# Altium PCB Source_Selector without cap.PcbDoc
Units mm, origin at the board's own origin, x right, y up, seen from the top; angles counter-clockwise.
Board outline 86.21 x 38.86 mm, 4 copper layers (Top Layer, GND, Power, Bottom Layer), stack 1.954 mm thick; 62 components, 42 nets, 204 pads, 22 vias.
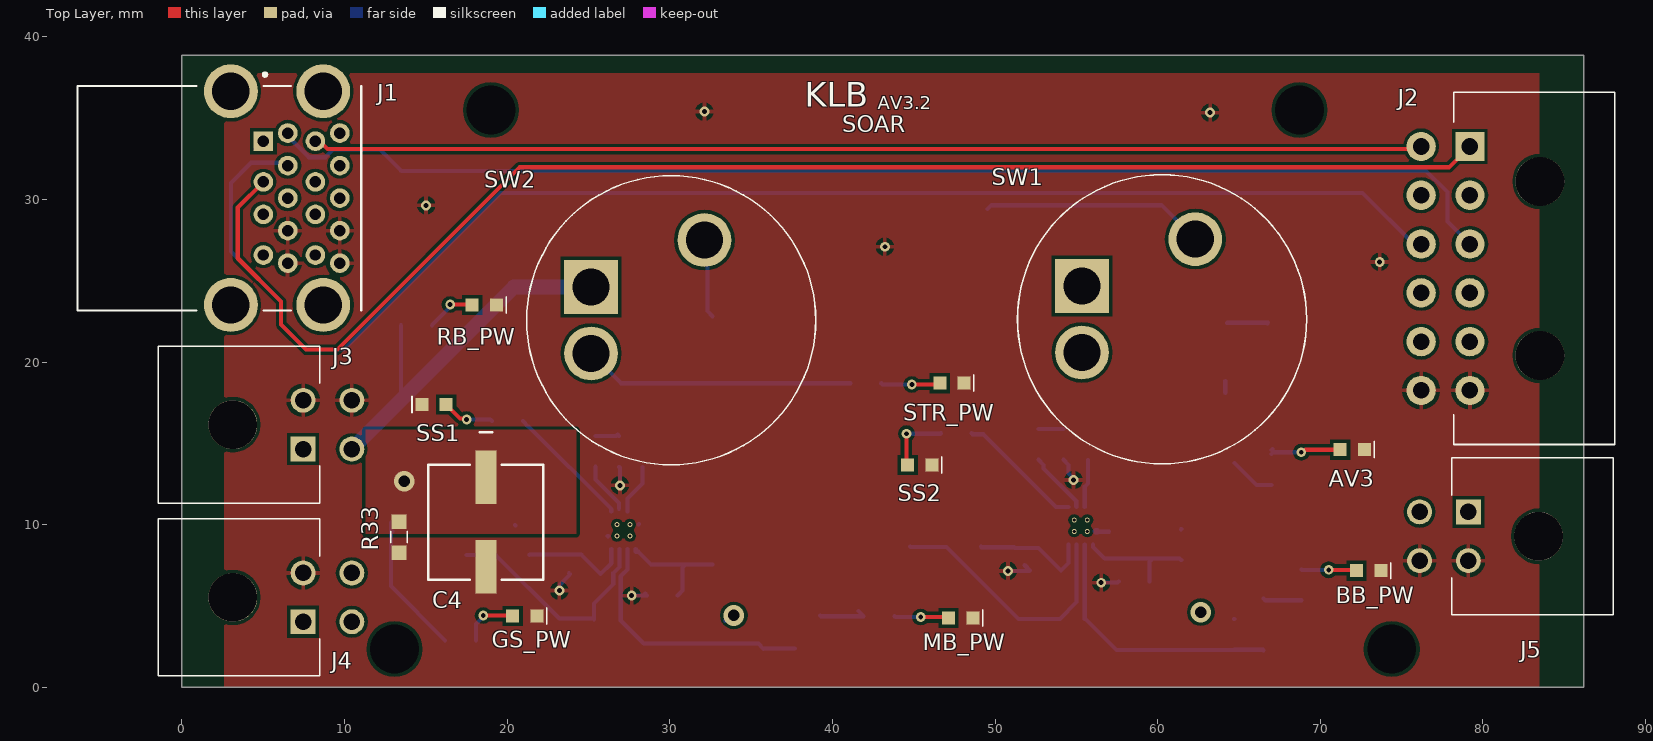
[diagram p0: Top Layer view]
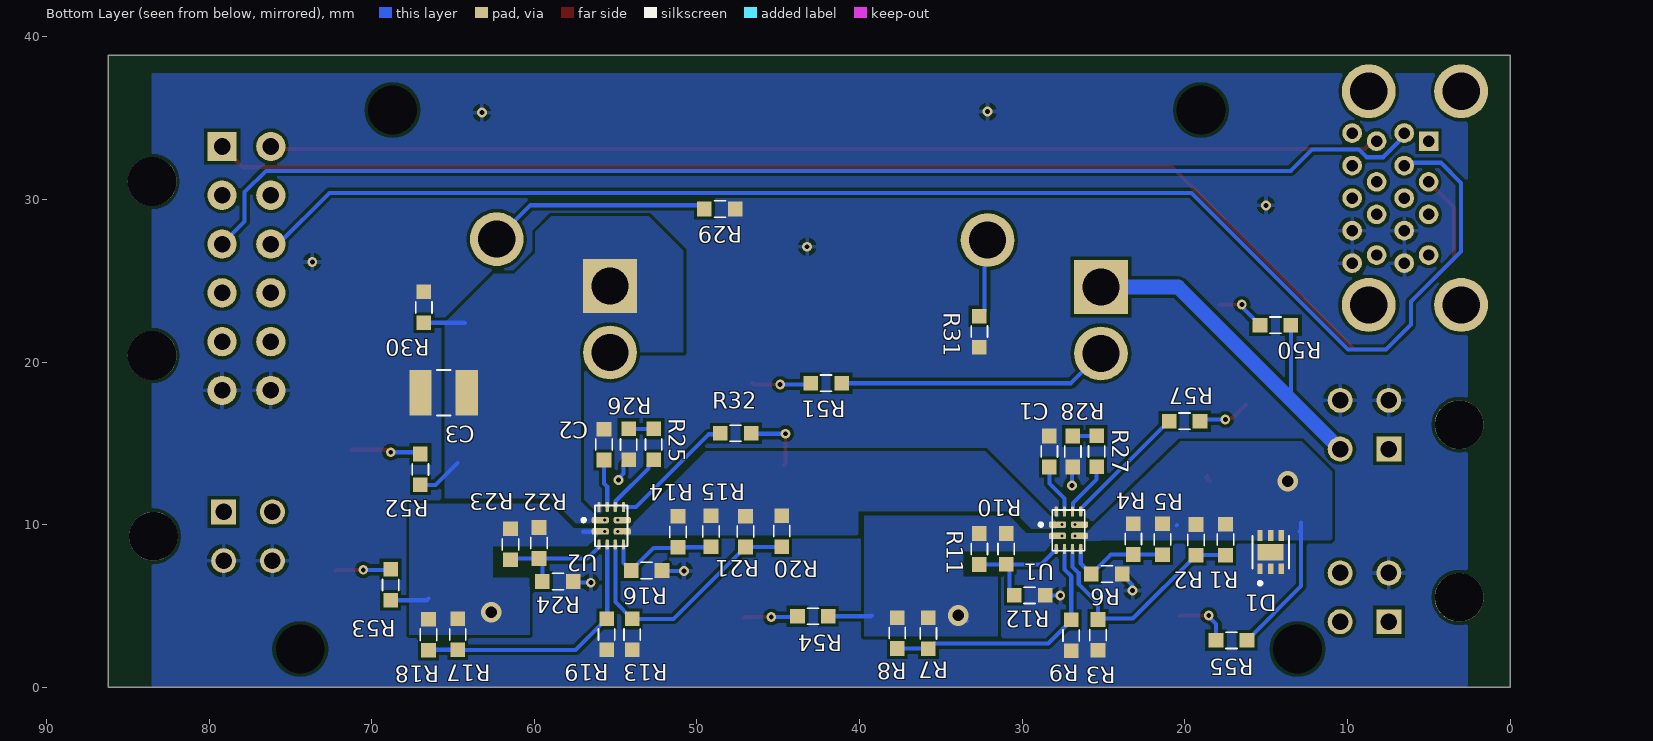
[diagram p1: Bottom Layer view, seen from below]
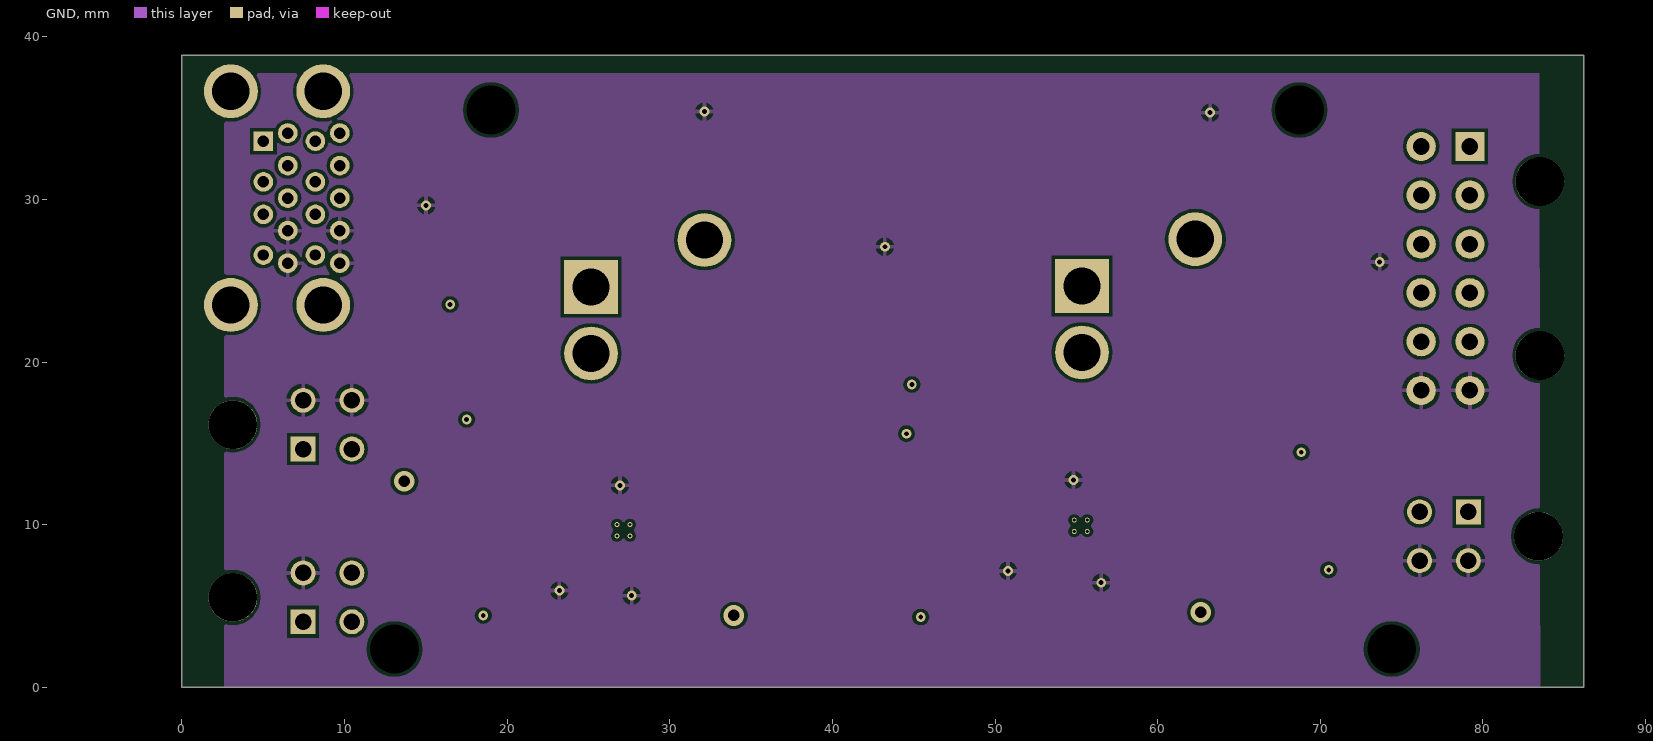
[diagram p2: GND]
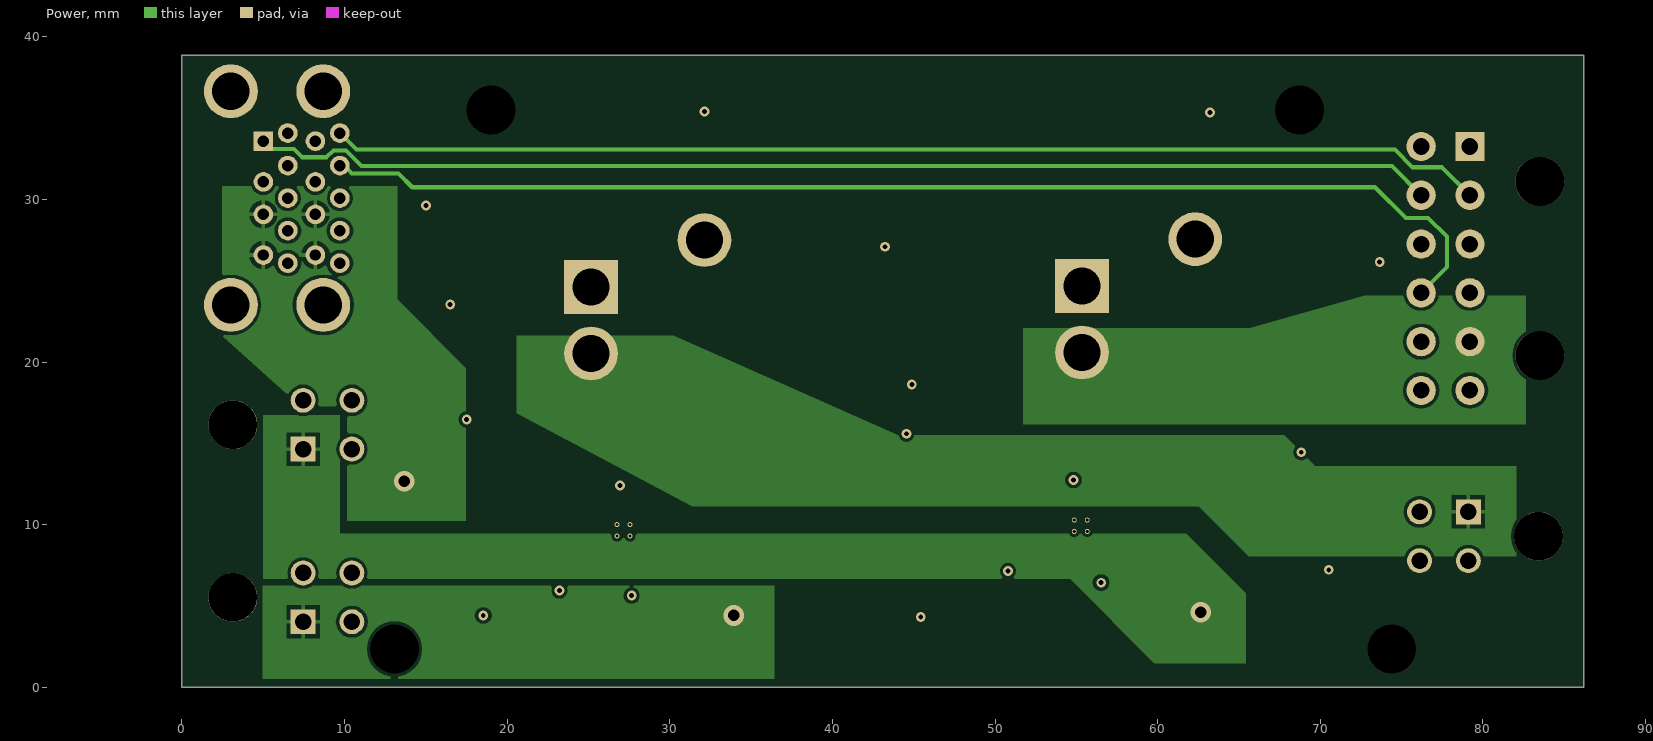
[diagram p3: Power]
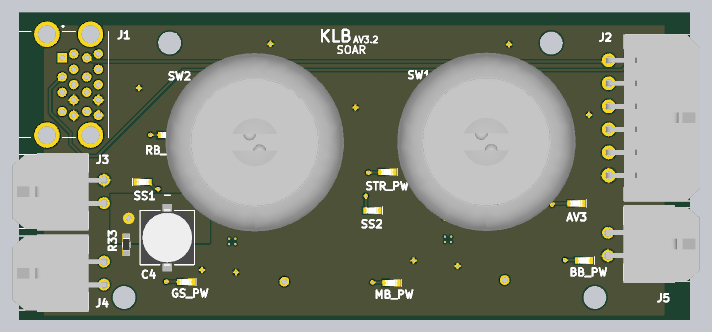
[diagram p4: 3D render of the assembled board from above, using the file's embedded part models]
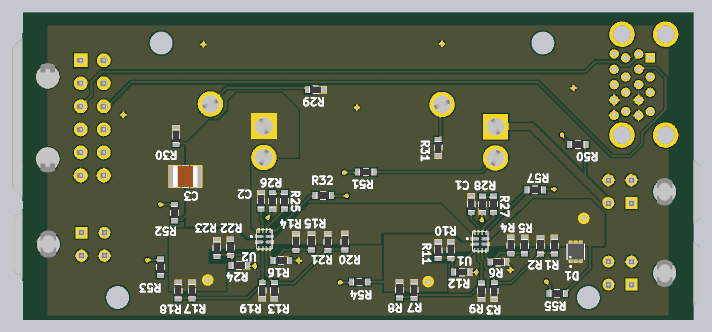
[diagram p5: 3D render of the assembled board from below, using the file's embedded part models]

## Layer stack, top to bottom
Top Solder: solder mask 0.01, Solder Resist, Dk 3.5
Top Layer: signal copper 0.071
Dielectric 2: prepreg 0.071, PP-006, Dk 4.1
GND: signal copper 0.035
Dielectric 1: dielectric 1.6, FR-4, Dk 4.8
Power: signal copper 0.035
Dielectric 3: prepreg 0.071, PP-006, Dk 4.1
Bottom Layer: signal copper 0.071
Bottom Solder: solder mask 0.01, Solder Resist, Dk 3.5

## Board outline
0,0 0,38.862 86.208,38.862 86.208,0

## Design rules (kind name [scope] priority, off if disabled: settings)
Clearance [All] p1: gap=0.204 ignorepadtopadclearanceinfootprint=TRUE
DiffPairsRouting [All] p1: maxlimit=0.254 minlimit=0.254 mostfreqgap=0.254 toplayer_minwidth=0.381 toplayer_maxwidth=0.381 toplayer_prefwidth=0.381 midlayer1_minwidth=0.381 midlayer1_maxwidth=0.381 midlayer1_prefwidth=0.381 midlayer2_minwidth=0.381 midlayer2_maxwidth=0.381 midlayer2_prefwidth=0.381 bottomlayer_minwidth=0.381 bottomlayer_maxwidth=0.381 bottomlayer_prefwidth=0.381 substack1={DE8956C6-F9BE-4731-8523-C3B132525F0B} toplayer_{de8956c6-f9be-4731-8523-c3b132525f0b}_minwidth=0.381 toplayer_{de8956c6-f9be-4731-8523-c3b132525f0b}_maxwidth=0.381 toplayer_{de8956c6-f9be-4731-8523-c3b132525f0b}_prefwidth=0.381 midlayer1_{de8956c6-f9be-4731-8523-c3b132525f0b}_minwidth=0.381 midlayer1_{de8956c6-f9be-4731-8523-c3b132525f0b}_maxwidth=0.381 midlayer1_{de8956c6-f9be-4731-8523-c3b132525f0b}_prefwidth=0.381 midlayer2_{de8956c6-f9be-4731-8523-c3b132525f0b}_minwidth=0.381 midlayer2_{de8956c6-f9be-4731-8523-c3b132525f0b}_maxwidth=0.381 midlayer2_{de8956c6-f9be-4731-8523-c3b132525f0b}_prefwidth=0.381 bottomlayer_{de8956c6-f9be-4731-8523-c3b132525f0b}_minwidth=0.381 bottomlayer_{de8956c6-f9be-4731-8523-c3b132525f0b}_maxwidth=0.381 bottomlayer_{de8956c6-f9be-4731-8523-c3b132525f0b}_prefwidth=0.381 maxuncoupledlength=12.7
Height [All] p1: minheight=0 maxheight=40 prefheight=4
PolygonConnect [All] p1: thpad.connectstyle=Relief thpad.reliefconductorwidth=0.254 thpad.reliefentries=4 thpad.polygonreliefangle="90 Angle" thpad.airgapwidth=0.254 smdpad.connectstyle=Direct smdpad.reliefconductorwidth=0.254 smdpad.reliefentries=4 smdpad.polygonreliefangle="90 Angle" smdpad.airgapwidth=0.254 via.connectstyle=Relief via.reliefconductorwidth=0.254 via.reliefentries=4 via.polygonreliefangle="90 Angle" via.airgapwidth=0.254
RoutingVias [All] p1: holewidth=0.711 width=1.27 viastyle="Through Hole" minholewidth=0.711 minwidth=1.27 maxholewidth=0.711 maxwidth=1.27
SolderMaskExpansion [All] p1: expansion=0.102 istentingtop=FALSE
Width [All] p1: maxlimit=1 minlimit=0.204 preferedwidth=0.254 substack1={DE8956C6-F9BE-4731-8523-C3B132525F0B} toplayer_{de8956c6-f9be-4731-8523-c3b132525f0b}_minwidth=0.15 toplayer_{de8956c6-f9be-4731-8523-c3b132525f0b}_maxwidth=0.254 midlayer1_{de8956c6-f9be-4731-8523-c3b132525f0b}_minwidth=0.15 midlayer1_{de8956c6-f9be-4731-8523-c3b132525f0b}_maxwidth=0.254 midlayer2_{de8956c6-f9be-4731-8523-c3b132525f0b}_minwidth=0.15 midlayer2_{de8956c6-f9be-4731-8523-c3b132525f0b}_maxwidth=0.254 bottomlayer_{de8956c6-f9be-4731-8523-c3b132525f0b}_minwidth=0.15 bottomlayer_{de8956c6-f9be-4731-8523-c3b132525f0b}_maxwidth=0.254
28 further rules are at their usual default settings.

## Classes and differential pairs
component class Source_Selector: AV3 BB_PW C1 C2 C3 GS_PW J1 J2 J3 J4 J5 MB_PW R1 R2 R3 R4 R5 R6 R7 R8 R9 R10 R11 R12 R13 R14 R15 R16 R17 R18 R19 R20 R21 R22 R23 R24 R25 R26 R27 R28 R29 R30 R31 R50 R51 R52 R53 R54 R55 R57 RB_PW SS1 STR_PW SW1 SW2 U1 U2

## Components (designator, comment, footprint, x,y, rotation, side; value= is the part's Value field where it differs from the comment)
AV3 "LTST-C191KGKT" LTST-C191KGKT 71.972,14.612 r180 top
BB_PW "LTST-C191KGKT" LTST-C191KGKT 72.979,7.17 r180 top
C1 "04025A101JAT2A" 0603[1608] 28.331,14.501 r270 bottom
C2 "04025A101JAT2A" 0603[1608] 55.715,14.928 r270 bottom
C3 "EMK325ABJ107MM-P" CAPC3225X280N 65.573,18.11 r180 bottom
C4 "UZG1E330MCL1GB" PCAP_6.3x3-ELECT_NCA-M 18.689,10.16 r270 top
D1 "TVS1800DRVR" TVS1800DRVR 14.722,8.311 r90 bottom
GS_PW "LTST-C191KGKT" LTST-C191KGKT 21.092,4.381 r180 top
J1 "0484060003" MOLEX_0484060003 6.359,30.082 r270 top
J2 "10132449-1221GLF" 10132449-1221GLF 79.849,25.757 r90 top
J3 "0430450400" 0430450400 6.792,16.15 r270 top
J4 "0430450400" 0430450400 6.792,5.533 r270 top
J5 "0430450400" 0430450400 79.763,9.289 r90 top
MB_PW "LTST-C191KGKT" LTST-C191KGKT 47.882,4.265 r180 top
R1 "MCT06030D5112BP500" 0603[1608] 17.503,9.083 r90 bottom
R2 "MCT06030D5112BP500" 0603[1608] 19.312,9.065 r90 bottom
R3 "RQ73C1J2K1BTD" 0603[1608] 25.336,3.223 r90 bottom
R4 "RNCF0603BTC20K0" 0603[1608] 23.167,9.116 r90 bottom
R5 "RMCF0603FT665K" 0603[1608] 21.374,9.098 r90 bottom
R6 "RT0603BRD075K11L" 0603[1608] 24.795,6.972 r0 bottom
R7 "MCT06030D5112BP500" 0603[1608] 35.768,3.32 r90 bottom
R8 "MCT06030D5112BP500" 0603[1608] 37.681,3.335 r90 bottom
R9 "RQ73C1J2K1BTD" 0603[1608] 26.993,3.198 r90 bottom
R10 "RT0603BRD0724KL" 0603[1608] 30.988,8.512 r90 bottom
R11 "CPF0603B510KE1" 0603[1608] 32.634,8.506 r90 bottom
R12 "RT0603BRD075K11L" 0603[1608] 29.538,5.657 r0 bottom
R13 "RQ73C1J2K1BTD" 0603[1608] 53.985,3.259 r90 bottom
R14 "RNCF0603BTC20K0" 0603[1608] 51.161,9.562 r90 bottom
R15 "RMCF0603FT665K" 0603[1608] 49.139,9.591 r90 bottom
R16 "RT0603BRD075K11L" 0603[1608] 53.099,7.186 r0 bottom
R17 "MCT06030D5112BP500" 0603[1608] 64.704,3.259 r90 bottom
R18 "MCT06030D5112BP500" 0603[1608] 66.507,3.233 r90 bottom
R19 "RQ73C1J2K1BTD" 0603[1608] 55.552,3.259 r90 bottom
R20 "MCT06030D5112BP500" 0603[1608] 44.788,9.601 r90 bottom
R21 "MCT06030D5112BP500" 0603[1608] 47.015,9.578 r90 bottom
R22 "RT0603BRD0724KL" 0603[1608] 59.71,8.875 r90 bottom
R23 "CPF0603B510KE1" 0603[1608] 61.46,8.791 r90 bottom
R24 "RT0603BRD075K11L" 0603[1608] 58.552,6.505 r0 bottom
R25 "RT0603BRE0718KL" 0603[1608] 52.662,14.945 r270 bottom
R26 "RT0603BRD075K11L" 0603[1608] 54.201,14.945 r90 bottom
R27 "RT0603BRE0718KL" 0603[1608] 25.425,14.514 r270 bottom
R28 "RT0603BRD075K11L" 0603[1608] 26.886,14.501 r90 bottom
R29 "CPF0603B510KE1" 0603[1608] 48.59,29.416 r0 bottom
R30 "RT0603BRD0724KL" 0603[1608] 66.789,23.368 r270 bottom
R31 "CPF0603B510KE1" 0603[1608] 32.634,21.867 r90 bottom
R32 "ERA-3AEB2491V" 0603[1608] 47.615,15.621 r0 bottom
R33 "RT0603BRD0724KL" 0603[1608] 13.348,9.23 r90 top
R50 "MCT06030C1301FP500" 0603[1608] 14.427,22.268 r180 bottom
R51 "MCT06030C1301FP500" 0603[1608] 42.055,18.702 r180 bottom
R52 "ERA-3AEB2491V" 0603[1608] 67.003,13.401 r270 bottom
R53 "ERA-3AEB2491V" 0603[1608] 68.837,6.307 r270 bottom
R54 "ERA-3AEB2491V" 0603[1608] 42.87,4.374 r180 bottom
R55 "ERA-3AEB2491V" 0603[1608] 17.13,2.891 r180 bottom
R57 "ERA-3AEB2491V" 0603[1608] 20.015,16.368 r0 bottom
RB_PW "LTST-C191KGKT" LTST-C191KGKT 18.6,23.503 r180 top
SS1 "LTST-C191KGKT" LTST-C191KGKT 15.502,17.396 r0 top
SS2 "LTST-C191KGKT" LTST-C191KGKT 45.379,13.675 r180 top
STR_PW "LTST-C191KGKT" LTST-C191KGKT 47.351,18.702 r180 top
SW1 "Y101132C203NQ" Y101132C203NQ 60.27,22.631 r0 top
SW2 "Y101132C203NQ" Y101132C203NQ 30.087,22.573 r0 top
U1 "TPS2121RUXR" IC_TPS2121RUXR 27.152,9.657 r180 bottom
U2 "TPS2121RUXR" IC_TPS2121RUXR 55.268,9.934 r180 bottom

## Footprints (in the part's own frame and the unit in brackets; to place one, negate y for a bottom-side part, rotate by r counter-clockwise, add the part's x,y. Pads: shape width x height; smd on the part's side, far side on the other; paste and mask are expansions set on the pad)
0603[1608] [mm]
  rect 0.9x0.9 smd mask+0.05: 1(-0.95,0) 2(0.95,0)
  silkscreen extent -0.35,-0.5 0.35,0.5, body extent -0.85,-0.45 0.85,0.45, height 0.55
10132449-1221GLF [mm] "CONN HEADER R/A 12POS 3MM"
  rect 1.8x1.8 hole 1.02 mask+0.05: 1(7.5,0.65)
  round 1.8 hole 1.02 mask+0.05: 2(7.5,3.65) 3(4.5,0.65) 4(4.5,3.65) 5(1.5,0.65) 6(1.5,3.65) 7(-1.5,0.65) 8(-1.5,3.65) 9(-4.5,0.65) 10(-4.5,3.65) 11(-7.5,0.65) 12(-7.5,3.65)
  round 3 hole 3 mask+0.05: ""(-5.35,-3.65) ""(5.35,-3.65)
  silkscreen extent -10.82,-8.25 10.82,1.65, body extent -10.82,-8.25 10.83,3.97, height 8.78
0430450400 [mm] "4-Pin Molex 3.00mm Pitch"
  round 3 hole 3 unplated mask+0.05: 0(0,-3.66)
  rect 1.53x1.53 hole 1.02 mask+0.05: 1(1.5,0.66)
  round 1.53 hole 1.02 mask+0.05: 2(-1.5,0.66) 3(1.5,3.66) 4(-1.5,3.66)
  silkscreen extent -4.82,-8.25 4.83,1.67, body extent -5.05,-8.25 5.1,3.99, height 8.83
CAPC3225X280N [mm]
  rect 1.37x2.81 smd: 1(-1.42,0) 2(1.42,0)
  silkscreen extent -0.42,-1.4 0.42,1.4, body extent -1.6,-1.4 1.6,1.4, height 2.5
IC_TPS2121RUXR [mm]
  rrect50% 1.05x0.4 smd mask+0: 1(-0.675,0.35) 2(-0.675,-0.35) 7(0.675,-0.35) 8(0.675,0.35)
  round 0.3 hole 0.2 mask+0: 1_1(-0.4,0.35) 2_1(-0.4,-0.35) 7_1(0.4,-0.35) 8_1(0.4,0.35)
  rrect50% 0.2x0.6 smd mask+0: 3(-0.75,-1.15) 4(-0.25,-1.15) 5(0.25,-1.15) 6(0.75,-1.15) 9(0.75,1.15) 10(0.25,1.15) 11(-0.25,1.15) 12(-0.75,1.15)
  silkscreen extent -1.8,-1.25 1,1.25
LTST-C191KGKT [mm] "Green 571nm LED Indication - Discrete 2V 0603"
  rect 0.8x0.8 smd paste-3 mask+0.05: 1(-0.75,0) 2(0.75,0)
  silkscreen extent -1.35,-0.5 -1.35,0.5, body extent -0.8,-0.4 0.8,0.4, height 0.8
MOLEX_0484060003 [mm]
  rect 1.208x1.208 hole 0.7: 1(-3.5,-1.35)
  round 1.208 hole 0.7: 2(-1,-1.35) 3(1,-1.35) 4(3.5,-1.35) 5(4,0.15) 6(2,0.15) 7(0,0.15) 8(-2,0.15) 9(-4,0.15) 10(-3.5,1.85) 11(-1,1.85) 12(1,1.85) 13(3.5,1.85) 14(4,3.35) 15(2,3.35) 16(0,3.35) 17(-2,3.35) 18(-4,3.35)
  round 3.316 hole 2.3: S1(-6.57,-3.35) S2(6.57,-3.35) S3(6.57,2.33) S4(-6.57,2.33)
  silkscreen extent -7.7,-12.79 6.9,4.67, body extent -7.25,-12.75 7.25,4.75, height 15.8
PCAP_6.3x3-ELECT_NCA-M [mm]
  rect 3.291x1.287 smd paste+0 mask+0: 1(-2.75,0) 2(2.75,0)
  silkscreen extent -5.51,-3.53 3.53,3.53, body extent -3.7,-3.4 3.7,3.4, height 3.25
TVS1800DRVR [mm]
  rect 0.66x0.32 smd: 1(-1.025,0.65) 2(-1.025,0) 3(-1.025,-0.65) 4(1.025,-0.65) 5(1.025,0) 6(1.025,0.65)
  rect 1x1.6 smd paste-2: 7(0,0)
  silkscreen extent -2.01,-1.13 1,1.13, body extent -1,-1 1,1, height 0.8
Y101132C203NQ [mil] "SWITCH KEYLOCK 2POS SPDT 4A 125V"
  rect 130x130 hole 90 mask+1.97: 1(-194.01,80.36)
  round 130 hole 90 mask+1.97: 3(80.36,194.01) 8(-194.01,-80.36)
  silkscreen extent -350,-350 350,350, body extent -457,-457 457,458, height 1148

## Part data
AV3 BB_PW GS_PW MB_PW RB_PW SS1 SS2 STR_PW: "LED GREEN CLEAR SMD 0603", Colour=Green, Current - Test=20mA, Lens Color=Colourless, Manufacturer="Lite-On Inc.", Millicandela Rating=35mcd, Package / Case="0603 (1608 Metric)", Supplier Part Number 1=160-1446-1-ND, Voltage - Forward (Vf) (Typ)=2V, ComponentLink1Description=Datasheet, ComponentLink1URL=http://optoelectronics.liteon.com/upload/download/DS22-2000-228/LTST-C191KGKT.PDF, Height (Max)=0.65mm, Lens Size="1.10mm x 0.80mm", Lens Style="Rectangle with Flat Top", Lens Transparency=Clear, Manufacturer Part Number=LTST-C191KGKT, Mounting Type="Surface Mount", Size / Dimension="1.60mm L x 0.80mm W", Supplier 1=Digi-Key, Viewing Angle=130°, Wavelength - Dominant=571nm, Wavelength - Peak=574nm
C1 C2: "CAP CER 100PF 50V C0G/NP0 0402", Capacitance=100pF, Manufacturer="AVX Corporation", Operating Temperature="-55°C ~ 125°C", Package / Case="0402 (1005 Metric)", Supplier Part Number 1=478-1082-1-ND, Temperature Coefficient="C0G, NP0", Tolerance=±5%, Voltage - Rated=50V, ComponentLink1Description=Datasheet, ComponentLink1URL=http://datasheets.avx.com/C0GNP0-Dielectric.pdf, Manufacturer Part Number=04025A101JAT2A, Mounting Type="Surface Mount, MLCC", Size / Dimension="0.039\" L x 0.020\" W (1.00mm x 0.50mm)", Supplier 1=Digi-Key, Thickness (Max)="0.022\" (0.56mm)"
C3: "CAP CER 100UF 16V X5R 1210", Capacitance=100µF, Manufacturer="Taiyo Yuden", Operating Temperature="-55°C ~ 85°C", Package / Case="1210 (3225 Metric)", Supplier Part Number 1=587-5426-1-ND, Temperature Coefficient=X5R, Tolerance=±20%, Voltage - Rated=16V, ComponentLink1Description=Datasheet, ComponentLink1URL=https://ds.yuden.co.jp/TYCOMPAS/ut/detail?pn=EMK325ABJ107MM-P%20&u=M, Manufacturer Part Number=EMK325ABJ107MM-P, Mounting Type="Surface Mount, MLCC", Size / Dimension="0.126\"\" L x 0.098\"\" W (3.20mm x 2.50mm)", Supplier 1=Digi-Key, Thickness (Max)="0.110\"\" (2.80mm)"
C4: "CAP ALUM 33UF 20% 25V SMD", Capacitance=33µF, Lifetime @ Temp.="1000 Hrs @ 105°C", Manufacturer=Nichicon, Operating Temp.="-40°C ~ 105°C", Ripple Current @ High Frequency="63mA @ 10kHz", Ripple Current @ Low Frequency="42mA @ 120Hz", Tolernace=±20%, Voltage=25V, Manufacturer_Part_Number=UZG1E330MCL1GB
D1: "UNIDIR PRECISION SURGE DIODE", Voltage - Clamping=24.7V, Manufacturer ID=TVS1800DRVR, Mounting Type="Surface Mount"
J1: "USB-A _USB TYPE-A_, Stacked USB 3.0 _USB 3.1 Gen 1, Superspeed_ Receptacle Connector 18 Position Through Hole, Right Angle", Package=None, Availability=Unavailable, MF=Molex, MP=0484060003, Price=None, SnapEDA_Link=https://www.snapeda.com/parts/0484060003/Molex/view-part/424547/?ref=snap
J2: "CONN HEADER R/A 12POS 3MM", Insulation Color=Black, Manufacturer="Amphenol ICC (FCI)", Material Flammability Rating="UL94 V-0", Operating Temperature="-40°C ~ 105°C", Supplier Part Number 1=609-5289-ND, Voltage Rating=250V, ComponentLink1Description=Datasheet, ComponentLink1URL=https://cdn.amphenol-icc.com/media/wysiwyg/files/documentation/datasheet/boardwiretoboard/bwb_minitekpwr3.0_hcc.pdf?__cf_chl_jschl_tk__=5b50c337d7977d3136f5a7e9c1a5138446a86722-1578191481-0-AdRe7fXYrldvOZ_oqyXIDS1Fw-yIkYCF-QCdaR8gv5bvudzwMePuF1OnY_qX9R1SRbUtnU8KyfMeQWvo-tgbYDs0UY0fEf2VYly7RnE44wN6RCRwe79pwwTkwB-vrp_E3FFt_m8Gv1l0VQgfDvqJJh9NWsFdXN6uiHYgEWJHQlxni9pgO_Rgu9b74Q_adNTuUPkDts4F_sjwuXFS2gwZ4qhDRVIbOsJk9z2IFwtIQbJe2Vjr12REDPUJnSIFI5L_m3PVR56FMV99EE0fexLx9E4Xzm8z4yXY4QuL_nxicuZLnFM8rKw84cv6VQDtrcv1h8b5URSWpnxkbKmN-6xqBT_N2gwuiomQytubllip4AB4QtXNO4uZy8p0Kaq8ZXDsS9f0XOGpGrNCvURFRCr5YrB2nakG2mZwStZMD_Rr-W-x1kEQ5VT0_Uar3vHfURsPPw, ComponentLink2Description=Drawing, ComponentLink2URL=https://cdn.amphenol-icc.com/media/wysiwyg/files/drawing/10132449.pdf?__cf_chl_jschl_tk__=3fb7538f61705fd3db72d6547b71e22025aaeae6-1578191484-0-ARZmBU2d2iTfwOyvkDW6juGvz8Wa7jPk-lPTAGC3bi6AwA2PAOw_83XbqimUoaj63c73oghkBl5EBlxfVnJt5FnKIy9_Ampqry6wpxN3P9yFfGzzu2bzrkjXc8H98cNGfE4yNZOx4lVYAc0DYF8iUgUBt3ot3PAqRWTuL_OE0dIKXvMd7u_4fU7igR1oB3QBFAu564mexcV1Dg4phJ9BA4kHFs6CIC10MmA2ZlPsaDWmfr6ivcYRarJOnVBN46Piz5s9Rafd2OkXuSIM4yJjlli4dKOItRDrJD3hRC0iA9RVgXipc9Ibd3Qny2RaW6xQiV-dovtBkpyFUGJQUyK5Difre6fQiv59Vrr2PfvD74WBgrERIBaIQ4JCRXFCC0XHSA, Contact Finish - Mating=Tin, Contact Finish - Post=Tin, Contact Length - Post="0.126\" (3.20mm)", Contact Material="Copper Alloy", Contact Shape=Square, Contact Type="Male Pin", Fastening Type="Locking Ramp", Features="Board Lock, Glow Wire Compliant", Insulation Height="0.343\" (8.71mm)", Insulation Material="Polyamide (PA9T), Nylon 9T", Manufacturer Part Number=10132449-1221GLF, Mounting Type="Through Hole, Right Angle", Number of Positions=12, Number of Positions Loaded=All, Number of Rows=2, Pitch - Mating="0.118\" (3.00mm)", Row Spacing - Mating="0.118\" (3.00mm)", Shrouding="Shrouded - 4 Wall", Style="Board to Cable/Wire", Supplier 1=Digi-Key, Termination=Solder
J3 J4 J5: "CONN HEADER R/A 4POS 3MM", Current Rating (Amps)=8A, Insulation Color=Black, Manufacturer=Molex, Material Flammability Rating="UL94 V-0", Supplier Part Number 1=WM1814-ND, Voltage Rating=600V, ComponentLink1Description=Datasheet, ComponentLink1URL=https://www.molex.com/pdm_docs/sd/430450400_sd.pdf, ComponentLink2Description="Product Specification", ComponentLink2URL=https://www.molex.com/pdm_docs/ps/PS-43045.pdf, Contact Finish - Mating=Tin, Contact Finish - Post=Tin, Contact Finish Thickness - Mating="100.0µin (2.54µm)", Contact Length - Post="0.125\" (3.18mm)", Contact Material=Brass, Contact Shape=Square, Contact Type="0.118\" (3.00mm)", Fastening Type="Locking Ramp", Features="Board Lock", Insulation Height="0.290\" (7.37mm)", Insulation Material="Liquid Crystal Polymer (LCP), Glass Filled", Manufacturer Part Number=0430450400, Mounting Type="Through Hole, Right Angle", Number of Positions=4, Number of Rows=2, Row Spacing - Mating="0.118\" (3.00mm)", Shrouding="Shrouded - 4 Wall", Supplier 1=Digi-Key, Termination=Solder
R1 R2 R7 R8 R17 R18 R20 R21: "RES SMD 51.1KOHM 0.1% 1/10W 0603", Manufacturer="Vishay Beyschlag/Draloric/BC Components", Operating Temperature="-55°C ~ 125°C", Package="0603 (1608 Metric)", Power  (W)=0.1W, Resistance=51.1K, Supplier Part Number 1=749-MCT06030D5112BP500CT-ND, Temperature Coefficient=±25ppm/°C, Tolerance=±0.1%, ComponentLink1Description=Datasheet, ComponentLink1URL=https://www.vishay.com/docs/28700/mcx0x0xpre.pdf, Composition="Thin Film", Manufacturer Part Number=MCT06030D5112BP500, Supplier 1=Digi-Key
R3 R9 R13 R19: "RES 2.1 KOHMS 0.1% 0.15W 0603", Manufacturer="TE Connectivity Passive Product", Operating Temperature="-55°C ~ 155°C", Package="0603 (1608 Metric)", Power  (W)=0.1W, Resistance=2.1K, Supplier Part Number 1=A140446TR-ND, Temperature Coefficient=±10ppm/°C, Tolerance=±0.1%, ComponentLink1Description=Datasheet, ComponentLink1URL=https://media.digikey.com/pdf/Data%20Sheets/Tyco%20Electronics%20P%20B%20PDFs/RQ73-0618%20v2.pdf, Composition="Thin Film", Manufacturer Part Number=RQ73C1J2K1BTD, Supplier 1=Digi-Key
R4 R14: "RES 20K OHM 0.1% 1/10W 0603", Manufacturer="Stackpole Electronics Inc", Operating Temperature="-55°C ~ 155°C", Package="0603 (1608 Metric)", Power  (W)=0.1W, Resistance=20K, Supplier Part Number 1=RNCF0603BTC20K0CT-ND, Temperature Coefficient=±50ppm/°C, Tolerance=±0.1%, ComponentLink1Description=Datasheet, ComponentLink1URL=https://www.seielect.com/catalog/sei-rncf.pdf, Composition="Thin Film", Manufacturer Part Number=RNCF0603BTC20K0, Supplier 1=Digi-Key
R5 R15: "RES 665K OHM 1% 1/10W 0603", Manufacturer="Stackpole Electronics Inc", Operating Temperature="-55°C ~ 155°C", Package="0603 (1608 Metric)", Power  (W)=0.1W, Resistance=665K, Supplier Part Number 1=RMCF0603FT665KCT-ND, Temperature Coefficient=±100ppm/°C, Tolerance=±1%, ComponentLink1Description=Datasheet, ComponentLink1URL=https://www.seielect.com/catalog/sei-rmcf_rmcp.pdf, Composition="Thick Film", Manufacturer Part Number=RMCF0603FT665K, Supplier 1=Digi-Key
R6 R12 R16 R24 R26 R28: "RES SMD 5.11KOHM 0.1% 1/10W 0603", Manufacturer=Yageo, Operating Temperature="-55°C ~ 155°C", Package="0603 (1608 Metric)", Power  (W)=0.1W, Resistance=5.11K, Supplier Part Number 1=YAG1695CT-ND, Temperature Coefficient=±25ppm/°C, Tolerance=±0.1%, ComponentLink1Description=Datasheet, ComponentLink1URL=https://www.yageo.com/upload/media/product/productsearch/datasheet/rchip/PYu-RT_1-to-0.01_RoHS_L_12.pdf, Composition="Thin Film", Manufacturer Part Number=RT0603BRD075K11L, Supplier 1=Digi-Key
R10 R22 R30 R33: "RES SMD 24K OHM 0.1% 1/10W 0603", Manufacturer=Yageo, Operating Temperature="-55°C ~ 155°C", Package="0603 (1608 Metric)", Power  (W)=0.1W, Resistance=24K, Supplier Part Number 1=YAG1600CT-ND, Temperature Coefficient=±25ppm/°C, Tolerance=±0.1%, ComponentLink1Description=Datasheet, ComponentLink1URL=https://www.yageo.com/upload/media/product/productsearch/datasheet/rchip/PYu-RT_1-to-0.01_RoHS_L_12.pdf, Composition="Thin Film", Manufacturer Part Number=RT0603BRD0724KL, Supplier 1=Digi-Key
R11 R23 R29 R31: "RES SMD 510K OHM 0.1% 1/16W 0603", Manufacturer="TE Connectivity Passive Product", Operating Temperature="-55°C ~ 155°C", Package="0603 (1608 Metric)", Power  (W)=1/16W, Resistance=510K, Supplier Part Number 1=A102291CT-ND, Temperature Coefficient=±25ppm/°C, Tolerance=±0.1%, ComponentLink1Description=Datasheet, ComponentLink1URL=https://www.te.com/commerce/DocumentDelivery/DDEController?Action=srchrtrv&DocNm=1773200&DocType=DS&DocLang=English, Composition="Thin Film", Manufacturer Part Number=CPF0603B510KE1, Supplier 1=Digi-Key
R25 R27: "RES SMD 18K OHM 0.1% 1/10W 0603", Manufacturer=Yageo, Operating Temperature="-55°C ~ 155°C", Package="0603 (1608 Metric)", Power  (W)=0.1W, Resistance=18K, Supplier Part Number 1=YAG4641CT-ND, Temperature Coefficient=±50ppm/°C, Tolerance=±0.1%, ComponentLink1Description=Datasheet, ComponentLink1URL=https://www.yageo.com/upload/media/product/productsearch/datasheet/rchip/PYu-RT_1-to-0.01_RoHS_L_12.pdf, Composition="Thin Film", Manufacturer Part Number=RT0603BRE0718KL, Supplier 1=Digi-Key
R32 R52 R53 R54 R55 R57: "RES SMD 2.49KOHM 0.1% 1/10W 0603", Manufacturer="Panasonic Electronic Components", Operating Temperature="-55°C ~ 155°C", Package="0603 (1608 Metric)", Power  (W)=0.1W, Resistance=2.49K, Supplier Part Number 1=P2.49KDBCT-ND, Temperature Coefficient=±25ppm/°C, Tolerance=±0.1%, ComponentLink1Description=Datasheet, ComponentLink1URL=https://industrial.panasonic.com/cdbs/www-data/pdf/RDM0000/AOA0000C307.pdf, Composition="Thin Film", Manufacturer Part Number=ERA-3AEB2491V, Supplier 1=Digi-Key
R50 R51: "RES SMD 1.3K OHM 1% 1/8W 0603", Manufacturer="Vishay Beyschlag", Operating Temperature="-55°C ~ 155°C", Package="0603 (1608 Metric)", Power  (W)=1/8W, Resistance=1.3K, Supplier Part Number 1=749-1605-1-ND, Temperature Coefficient=±50ppm/°C, Tolerance=±1%, ComponentLink1Description=Datasheet, ComponentLink1URL=http://www.vishay.com/docs/28705/mcx0x0xpro.pdf, Composition="Thin Film", Manufacturer Part Number=MCT06030C1301FP500, Supplier 1=Digi-Key
SW1 SW2: "SWITCH KEYLOCK 2POS SPDT 4A 125V", Current Rating (Amps)="4A (AC/DC)", Manufacturer=C&K, Supplier Part Number 1=CKN11517-ND, Voltage Rating - AC=125V, Voltage Rating - DC=28V, Actuator Type="Flat Key", Angle of Throw=90°, Circuit=SPDT, ComponentLink1Description=Datasheet, ComponentLink1URL=https://dznh3ojzb2azq.cloudfront.net/products/Switchlock/Y/documents/datasheet.pdf, Contact Finish=Silver, Contact Material=Copper, Contact Timing="Not Specified", Depth Behind Flange=28.83mm, Electrical Life="10,000 Cycles", Key Removable Positions="1 only", Manufacturer Part Number=Y101132C203NQ, Mounting Type="Panel Mount", Number of Positions=2, Panel Cutout Dimensions="Circular - 19.30mm Dia", Supplier 1=Digi-Key, Switch Function=On-On, Termination Style="Solder Lug"
U1 U2: "PWR MGMT BATTERY MGMT", ComponentLink1Description=Datasheet, ComponentLink1URL=https://www.ti.com/general/docs/suppproductinfo.tsp?distId=10&gotoUrl=http%253A%252F%252Fwww.ti.com%252Flit%252Fgpn%252Ftps2120, Supplier 1="Arrow Electronics", Supplier Part Number 1=TPS2121RUXR

## Free pads (board coordinates)
  round 1.524 hole 3 unplated: 0(13.066,2.352) 0(19,35.5) 0(68.715,35.5) 0(74.392,2.352)

## Via types
v1: diameter 0.6, hole 0.3, Top Layer to Bottom Layer, 19 vias
v2: diameter 1.27, hole 0.711, Top Layer to Bottom Layer, 3 vias

## Nets (pads, with @x,y where several pads share a name; then routed paths per layer and width w, separated by ;. In a path a pad name is that pad's centre, name@x,y a point inside that pad or via, vN(x,y) a via of type N, cw(c..) or ccw(c..) an arc to the next point about the centre after c; other vN are vias at no path point)
"7.5V Recovery Bat": J3.3 R50.2 SW2.1 | length 23.7
  Bottom Layer w0.254: J3.3 J3.3@10.688,14.65 ; 13.477,17.676 R50.2
  Bottom Layer w0.9: J3.3 13.477,17.676 20.415,24.614 SW2.1
"12V Backup Bat": J3.1 R17.2 R18.2 R22.2 R23.2 R53.2 U2.2 | length 3.3
  Bottom Layer w0.254: U2.2@56.199,9.584 56.212,9.571 57.008,9.571 ; R23.2@61.44,9.721 R23.2 ; R17.2@64.689,4.194 R17.2 ; 66.502,5.466 66.612,5.357 R53.2
  Bottom Layer w0.4: U2.2@56.199,9.584 U2.2@56.268,9.584
  other v2: 62.652,4.623
"12V Main Bat": J4.1 R7.2 R8.2 R10.2 R11.2 R54.2 U1.2 | length 3.8
  Bottom Layer w0.254: 33.393,4.094 33.404,4.094 33.729,4.42 v2(33.942,4.42) ; 39.253,4.417 39.296,4.374 R54.2 R54.2@41.597,4.697
GND: AV3.1 BB_PW.1 C1.1 C2.1 C3.1 C4.2 D1.1 D1.2 D1.3 D1.7 GS_PW.1 J1.5 J1.6 J1.14 J1.15 J2.11 J2.12 J3.2 J3.4 J4.2 J5.2 J5.4 MB_PW.1 R3.1 R6.1 R9.1 R12.1 R13.1 R16.1 R19.1 R24.1 R26.1 R28.1 R29.1 R30.1 R31.1 R33.1 RB_PW.1 SS1.1 SS2.1 STR_PW.1 U1.12 U2.12 | length 7.9
  Bottom Layer w0.254: v1(23.211,5.951) 23.211,6.279 R6.1@23.8,6.868 ; R6.1@23.8,7.018 R6.1 ; R28.1 26.937,13.5 v1(26.937,12.416) ; v1(27.653,5.641) 28.572,5.641 R12.1 R12.1@28.489,5.756 ; v1(50.795,7.155) 52.118,7.155 R16.1 R16.1@51.826,7.509 ; R26.1 54.524,13.672 54.524,13.141 54.823,12.842 v1(54.823,12.748) ; v1(56.523,6.436) 57.533,6.436 R24.1
  other v1: 73.65,26.157 43.226,27.092 15.011,29.634 63.221,35.342 32.131,35.405
"GS PROP1 12V": J1.1 J2.4 | length 74.9
  GND w0.254: J1.1 J1.1@5.486,33.105
  Power w0.254: J1.1 5.486,33.105 6.093,33.105 6.101,33.097 6.887,33.097 7.387,32.597 8.902,32.597 9.322,33.017 10.096,33.017 11.053,32.06 74.397,32.06 J2.4
  Bottom Layer w0.254: J1.1@4.532,33.105 J1.1 J1.1@5.486,33.105
"GS PROP2 12V": J1.8 J2.6 | length 90.1
  Bottom Layer w0.254: J1.8 6.333,32.258 4.257,32.258 3.02,31.021 3.02,26.8 6.099,23.721 6.099,22.301 7.633,20.767 9.959,20.767 15.831,26.638 19.594,30.401 72.601,30.401 75.745,27.257 J2.6
"GS PROP3 12V": J1.17 J2.8 | length 74
  Power w0.254: J1.17 9.967,32.082 10.447,31.602 13.311,31.602 14.163,30.749 73.37,30.749 75.255,28.865 76.632,28.865 77.782,27.714 77.782,25.84 J2.8
"LAUNCH 12V": J1.2 J2.1 | length 89.6
  Top Layer w0.254: J1.2 3.434,29.507 3.434,26.386 6.099,23.721 6.099,22.301 7.633,20.767 9.561,20.767 20.77,31.976 77.918,31.976 J2.1
  Bottom Layer w0.254: J1.2@5.009,30.89 J1.2
NetAV3_2: AV3.2 R52.1 | length 4.4
  Top Layer w0.254: v1(68.829,14.458) 68.923,14.458 69.077,14.612 AV3.2
  Bottom Layer w0.254: R52.1 67.109,14.458 v1(68.829,14.458) ; R52.1@67.003,14.603 R52.1@67.05,14.649
NetBB_PW_2: BB_PW.2 R53.1 | length 3.4
  Top Layer w0.254: v1(70.515,7.224) 72.176,7.224 BB_PW.2
  Bottom Layer w0.254: R53.1 68.87,7.224 v1(70.515,7.224)
NetC1_2: C1.2 U1.11 | length 3.1
  Bottom Layer w0.254: U1.11 27.402,11.616 28.331,12.545 C1.2
NetC2_2: C2.2 U2.11 | length 3
  Bottom Layer w0.254: U2.11 55.518,12.344 55.715,12.54 C2.2
NetC3_2: C3.2 R30.2 R52.2 SW1.1 U2.1 | length 6.1
  Bottom Layer w0.254: C3.2 C3.2@64.153,18.83 ; 64.27,22.405 64.282,22.418 R30.2 R30.2@66.744,22.372 ; 64.732,13.787 66.068,12.451 R52.2
NetGS_PW_2: GS_PW.2 R55.1 | length 3.6
  Top Layer w0.254: v1(18.532,4.412) 20.312,4.412 GS_PW.2
  Bottom Layer w0.254: R55.1 18.08,3.901 18.532,4.353 v1(18.532,4.412) v1@18.466,4.346
NetMB_PW_2: MB_PW.2 R54.1 | length 3.4
  Top Layer w0.254: v1(45.428,4.318) 47.078,4.318 MB_PW.2
  Bottom Layer w0.254: R54.1 43.876,4.318 v1(45.428,4.318)
NetR1_1: R1.1 R2.1 R3.2 U1.5 | length 14.5
  Bottom Layer w0.254: R1.1 19.294,8.133 R2.1 23.2,4.227 25.283,4.227 R3.2 25.336,5.165 26.526,6.355 26.526,7.023 26.902,7.399 U1.5
NetR4_1: R4.1 R5.1 R6.2 U1.6 | length 6.7
  Bottom Layer w0.254: R5.1 21.392,8.166 R4.1 24.552,8.166 R6.2 26.402,7.629 U1.6
NetR7_1: R7.1 R8.1 R9.2 U1.4 | length 16
  Bottom Layer w0.254: U1.4 27.402,7.251 26.984,6.833 26.984,4.108 28.399,2.693 35.445,2.693 R7.1 35.784,2.385 R8.1
NetR10_1: R10.1 R11.1 R12.2 U1.3 | length 7.3
  Bottom Layer w0.254: U1.3 27.902,8.361 27.929,8.334 28.075,8.334 28.848,7.562 R10.1 ; R12.2 30.782,5.951 30.782,7.356 R10.1 ; R11.1 30.993,7.556 R10.1
NetR13_2: R13.2 R20.1 R21.1 U2.5 | length 16
  Bottom Layer w0.254: R20.1 44.811,8.628 R21.1 51.435,4.209 R13.2 55.018,5.242 U2.5
NetR14_1: R14.1 R15.1 R16.2 U2.6 | length 7.3
  Bottom Layer w0.254: R15.1 49.168,8.612 R14.1 51.198,8.575 52.659,8.575 R16.2 54.518,7.655 U2.6
NetR14_2: R14.2 R15.2 R20.2 R21.2 U1.1 U2.7 | length 0
  Bottom Layer w0.254: U1.1@28.083,10.007 U1.1@28.114,10.038
NetR17_1: R17.1 R18.1 R19.2 U2.4 | length 16.3
  Bottom Layer w0.254: R19.2@55.518,4.209 U2.4 ; R19.2 57.457,2.304 64.699,2.304 R17.1 66.482,2.309 R18.1
NetR22_1: R22.1 R23.1 R24.2 U2.3 | length 7.4
  Bottom Layer w0.254: U2.3 56.018,8.638 56.742,7.915 R22.1@59.7,7.915 ; R24.2 59.502,7.717 R22.1@59.7,7.915 ; R23.1 61.44,7.821 61.336,7.925 R22.1 R22.1@59.7,7.915
NetR25_1: R25.1 R26.2 | length 1.5
  Bottom Layer w0.254: R25.1 R26.2
NetR25_2: R25.2 U2.10 | length 3.9
  Bottom Layer w0.254: R25.2 52.985,13.672 52.985,13.456 54.991,11.449 54.991,11.111 U2.10
NetR27_1: R27.1 R28.2 | length 1.5
  Bottom Layer w0.254: R27.1 26.721,15.464 26.797,15.54 R28.2
NetR27_2: R27.2 U1.10 | length 3.2
  Bottom Layer w0.254: R27.2 25.425,12.781 26.875,11.332 U1.10@26.875,10.98
NetR29_2: R29.2 SW1.3 | length 13.7
  Bottom Layer w0.254: R29.2 49.771,29.647 60.223,29.647 SW1.3
NetR31_2: R31.2 SW2.3 | length 4.9
  Bottom Layer w0.254: SW2.3 32.311,27.318 32.311,23.14 R31.2
NetR32_1: R32.1 SS2.2 | length 4.1
  Top Layer w0.254: v1(44.552,15.596) 44.552,13.753 SS2.2
  Bottom Layer w0.254: v1(44.552,15.596) 46.639,15.596 R32.1
NetR32_2: R32.2 U2.9 | length 7.8
  Bottom Layer w0.254: R32.2 48.621,15.565 49.271,15.565 53.752,11.084 U2.9
NetR50_1: R50.1 RB_PW.2 | length 3.1
  Top Layer w0.254: v1(16.495,23.536) 17.817,23.536 RB_PW.2
  Bottom Layer w0.254: R50.1 16.429,23.32 16.429,23.469 v1(16.495,23.536)
NetR51_1: R51.1 STR_PW.2 | length 3.7
  Top Layer w0.254: v1(44.882,18.621) 46.519,18.621 STR_PW.2
  Bottom Layer w0.254: R51.1 43.086,18.621 v1(44.882,18.621)
NetR57_1: R57.1 SS1.2 | length 3.2
  Top Layer w0.254: SS1.2 17.11,16.538 17.442,16.538 v1(17.508,16.472)
  Bottom Layer w0.254: v1(17.508,16.472) 18.961,16.472 R57.1
NetR57_2: R57.2 U1.9 | length 7.8
  Bottom Layer w0.254: R57.2 21.288,16.045 21.31,16.045 26.402,10.953 U1.9
"POWER 12V": C4.1 D1.4 D1.5 D1.6 J1.3 J1.4 J1.12 J1.13 R1.2 R2.2 R4.2 R5.2 R33.2 R55.2 U1.7 | length 9.7
  Top Layer w0.254: C4.1@18.441,12.662 C4.1 C4.1@18.595,13.005
  Bottom Layer w0.254: J1.13@8.209,26.182 J1.13 ; 12.85,10.124 12.85,6.22 R55.2 ; 12.859,9.48 12.957,9.578 ; 20.49,9.972 20.503,9.959 ; U1.7@26.159,9.307 26.19,9.276 U1.7@26.221,9.307
  other v2: 13.673,12.662
RX: J1.9 J2.5 | length 78
  Power w0.254: J1.9@6.251,34.34 J1.9@6.509,34.34 ; J1.9@6.256,34.082 J1.9 ; J2.5@79.107,27.165 J2.5
  Bottom Layer w0.254: J1.9@6.509,34.34 J1.9 6.509,33.889 7.801,32.597 8.831,32.597 9.302,33.068 12.182,33.068 13.49,31.76 76.508,31.76 77.817,30.451 77.817,28.64 J2.5
"SOL CTRL 12V": J1.10 J2.2 | length 68.7
  Top Layer w0.254: J1.10 8.467,33.582 8.952,33.097 76.039,33.097 J2.2
  GND w0.254: J1.10 J1.10@8.467,33.582 ; J2.2@76.036,33.094 J2.2
"Stratologger Power": J5.1 R51.2 SW2.8 | length 16.8
  Bottom Layer w0.254: SW2.8@25.289,20.531 SW2.8 26.989,18.702 R51.2
TX: J1.18 J2.3 | length 71.1
  Power w0.254: J1.18 10.73,33.061 74.584,33.061 75.669,31.976 77.48,31.976 J2.3
Vout: J2.9 SW1.8
pads on no net: J1.7 J1.11 J1.16 J1.S1 J1.S2 J1.S3 J1.S4 J2. J2.7 J2.10 J3.0 J4.0 J4.3 J4.4 J5.0 J5.3 U1.1_1 U1.2_1 U1.7_1 U1.8 U1.8_1 U2.1_1 U2.2_1 U2.7_1 U2.8 U2.8_1

## Polygon pours and split planes (outlines as drawn)
"12V Backup Bat" on Power "Power-12V Backup Bat" (solid, pour order 34): 65.404,5.772 65.404,1.491 59.789,1.491 54.613,6.667 4.999,6.667 4.999,16.741 5.243,16.741 9.7,16.741 9.7,9.435 61.741,9.435
"Stratologger Power" on Power "Power-Stratologger Power" (solid, pour order 30): 20.592,21.605 30.254,21.605 44.036,15.494 67.793,15.494 69.693,13.594 82.062,13.594 82.062,8.062 65.596,8.062 62.537,11.12 31.377,11.12 20.592,16.848
"12V Main Bat" on Power "Power-12V Main Bat" (solid, pour order 32): 36.434,6.256 36.434,0.536 4.976,0.536 4.976,2.314 4.976,6.256
"POWER 12V" on Power "Power-POWER 12V" (solid, pour order 36): 2.479,30.803 13.228,30.803 13.228,23.858 17.468,19.619 17.468,10.241 10.168,10.241 10.168,17.272 7.33,17.272 2.479,21.609
Vout on Power "Power-Vout" (solid, pour order 38): 82.634,24.087 82.634,16.162 51.747,16.162 51.747,22.088 65.622,22.088 72.71,24.087
GND on Bottom Layer "GND_L04_P074" (solid, pour order 74): 2.614,0.001 2.615,0 83.51,0 83.51,37.714 83.463,37.761 2.614,37.761
"12V Main Bat" on Bottom Layer "12V_MAIN_BAT_L04_P066" (solid, pour order 66): 31.501,5.944 31.501,6.807 33.614,6.807 33.614,8.377 28.626,8.377 28.303,8.7 28.303,8.831 27.827,9.307 28.001,9.487 29.736,9.487 30.808,10.559 39.726,10.559 39.726,3.139 31.501,3.139
NetR14_2 on Bottom Layer "NETR14_2_L04_P069" (solid, pour order 69): 40.084,9.337 54.427,9.337 54.535,9.446 49.454,14.526 32.267,14.526 27.886,10.145 27.886,9.757 29.447,9.757 30.505,10.815 40.084,10.815
NetC3_2 on Bottom Layer "NETC3_2_L04_P065" (solid, pour order 65): 59.931,26.714 61.218,25.428 62.504,25.428 65.519,22.413 65.519,11.633 58.979,11.633 57.445,10.099 56.384,10.099 56.227,10.257 56.144,10.455 57.145,11.455 57.145,20.531 57.084,20.592 50.83,20.592 50.83,26.845 52.951,28.966 58.966,28.966 59.931,28.001
"12V Backup Bat" on Bottom Layer "12V_BACKUP_BAT_L04_P064" (solid, pour order 64): 60.302,6.746 60.287,6.731 60.305,6.713 60.295,5.626 60.295,3.228 63.817,3.228 67.676,3.228 67.676,11.293 59.073,11.293 57.561,9.782 55.618,9.782 56.736,8.664 62.568,8.664 62.568,6.746
"POWER 12V" on Bottom Layer "POWER_12V_L04_P067" (solid, pour order 67): 18.222,9.017 25.042,9.035 -94.025,9.017 26.101,9.017 26.419,9.169 20.262,15.121 12.797,15.121 10.945,13.269 10.945,9.017
no net on Bottom Layer "NONET_L04_P072" (solid, pour order 72): 2.615,0
GND on GND "GND-GND" (solid, pour order 42): 83.51,0 83.463,37.761 2.614,37.761 2.614,0.001
GND on Top Layer "GND_L01_P080" (solid, pour order 80): 2.614,0.001 83.509,0.001 83.463,0.047 83.463,37.761 2.614,37.761
"POWER 12V" on Top Layer "POWER_12V_L01_P079" (solid, pour order 79): 11.303,15.827 11.303,9.433 24.242,9.433 24.242,15.827

## Silkscreen, mask and mechanical layers (free items; w line width, h text height)
Top Overlay:
  text "KLB" at 38.301,35.7 h1.5
  text "AV3.2" at 42.788,35.557 h0.8
  text "SOAR" at 40.614,34.142 h1
Board:
  the board outline again, w1.2